# EAGLE board node-mcu-pack (EAGLE 7.5.0)
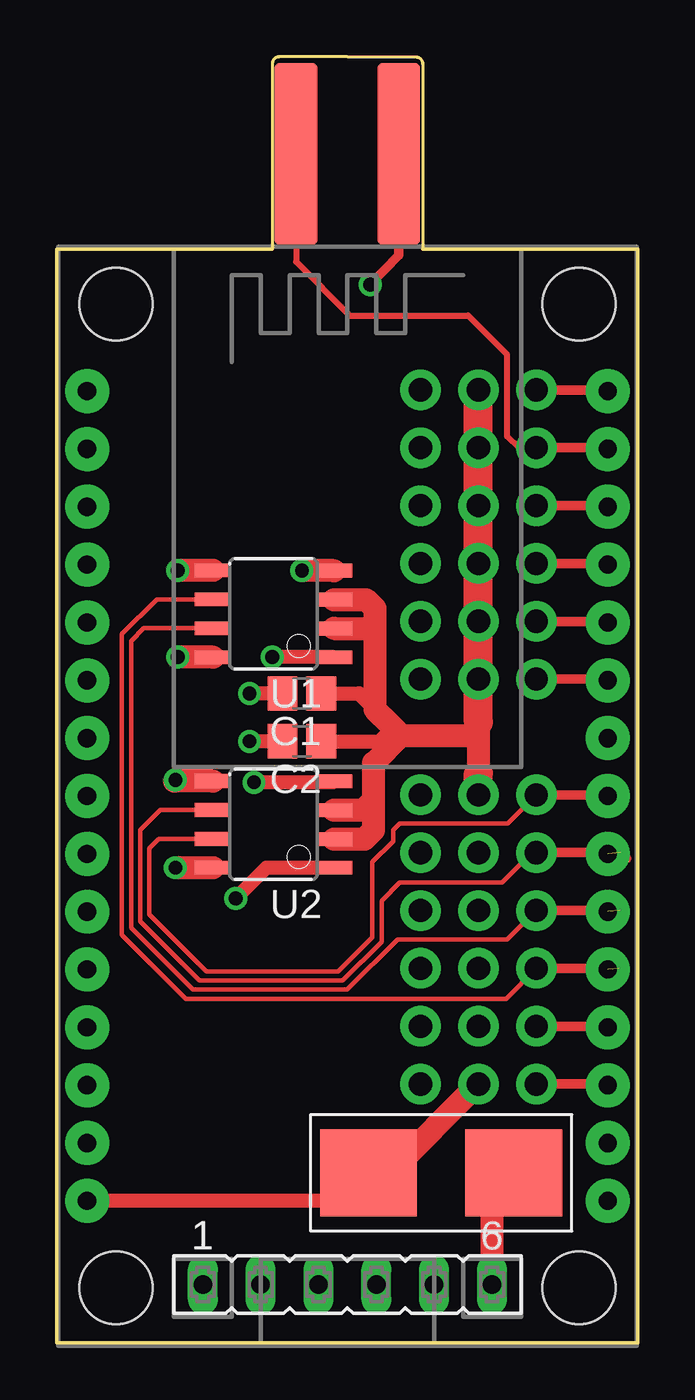
[diagram p0: board, top side]
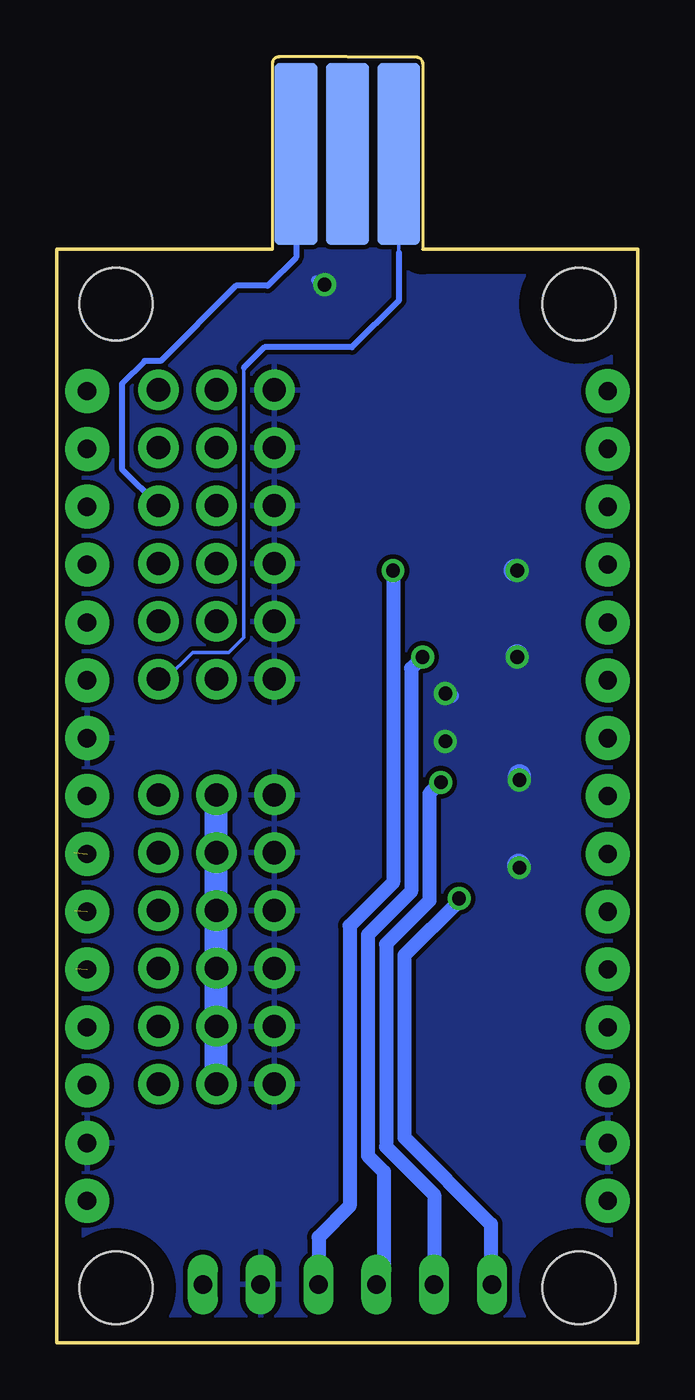
[diagram p1: board, bottom side, seen from below]

Size 25.5 x 56.45 mm. Coordinates in mm from the lower left corner, seen from the top.
Outline: 9.45,48 0,48 0,0 25.5,0 25.5,48 16.05,48
Copper layers (1*16): Top 0.035mm / dielectric 1.5mm / Bottom 0.035mm
Design rules "default": minimum track width 10mil, minimum drill 24mil, track to track 8mil, track to pad 8mil, pad to pad 8mil, via to via 8mil, smd to smd 8mil, copper to edge 40mil, drill to drill 8mil, minimum pad ring 10mil, minimum via ring 8mil, stop-mask expansion 4mil, vias tented up to drill 0mil, thermal gap 10mil

## Footprints (pad centres in the part's own frame; a part is rotated, then mirrored left to right if it is on the bottom)
C0805 = smd 1.3 x 1.5: 1 -0.85,0; 2 0.85,0
0154 = smd 4.24 x 3.81: 1 0,0; 2 6.38,0
IOBLOCK100MILX6 = drill 1.016 pad 1.778: G1 -5.08,5.08; G2 -2.54,5.08; G3 0,5.08; G4 2.54,5.08; G5 5.08,5.08; G6 7.62,5.08; P1 -5.08,2.54; P2 -2.54,2.54; P3 0,2.54; P4 2.54,2.54; P5 5.08,2.54; P6 7.62,2.54; P$1 -5.08,0; P$2 -2.54,0; P$3 0,0; P$4 2.54,0; P$5 5.08,0; P$6 7.62,0
FE06 = drill 0.813 long: 1 -6.35,0; 2 -3.81,0; 3 -1.27,0; 4 1.27,0; 5 3.81,0; 6 6.35,0
8S1 = smd 0.6 x 1.6: 1 -1.905,-2.654; 2 -0.645,-2.654; 3 0.625,-2.654; 4 1.895,-2.654; 5 1.905,2.654; 6 0.635,2.654; 7 -0.635,2.654; 8 -1.905,2.654
ESP12E_DEVKIT = drill 0.8 pad 1.93: 3V3@0 -11.43,-7.62; 3V3@1 11.43,5.08; 3V3@2 11.43,-17.78; AD0 -11.43,17.78; CLK -11.43,-2.54; CMD -11.43,2.54; D0 11.43,17.78; D1 11.43,15.24; D2 11.43,12.7; D3 11.43,10.16; D4 11.43,7.62; D5 11.43,0; D6 11.43,-2.54; D7 11.43,-5.08; D8 11.43,-7.62; EN -11.43,-10.16; GND@0 -11.43,-5.08; GND@1 -11.43,-15.24; GND@2 11.43,2.54; GND@3 11.43,-15.24; RST -11.43,-12.7; RSV@0 -11.43,15.24; RSV@1 -11.43,12.7; RX 11.43,-10.16; SD0 -11.43,0; SD1 -11.43,5.08; SD2 -11.43,7.62; SD3 -11.43,10.16; TX 11.43,-12.7; VIN -11.43,-17.78 | hole 3.2: -10.16,21.59; 10.16,21.59; 10.16,-21.59; -10.16,-21.59
CHUCK-OUTIE = smd 8 x 1.88 bottom: ATT 4.2,0; DAT 4.2,-2.255; PWR 4.2,2.255 | smd 8 x 1.88: CLK 4.2,2.255; GND 4.2,-2.255

## Placement (x,y rotation side)
C1  [C0805]  10.75,28.5 180 top
C2  [C0805]  10.75,26.4 180 top
F1  0154  [0154]  20.05,7.45 180 top
J1  IOBLOCK6  [IOBLOCK100MILX6]  21.04,36.75 270 bottom
J2  IOBLOCK6  [IOBLOCK100MILX6]  21.04,18.97 270 bottom
SV1  [FE06]  12.75,2.55 0 top
U1  L9110SMT  [8S1]  9.5,32 90 top
U2  L9110SMT  [8S1]  9.5,22.75 90 top
U$1  ESP12E_DEVKIT  [ESP12E_DEVKIT]  12.75,24 0 top
U$2  WIICHUCKOUTIE  [CHUCK-OUTIE]  12.75,48 90 top

## Library data of the parts
C1 C2 = adafruit
F1 = SMT_Fuse_0154001
J1 J2 = ioblock
SV1 = con-lsta; OC_FARNELL: unknown; OC_NEWARK: unknown
U1 U2 = L9110h
U$1 = ESP12E_DEVKIT
U$2 = wiichuck

## Nets
1AO: SV1.3 U1.1
1BO: SV1.4 U1.4
2AO: SV1.1 U2.1
2BO: SV1.2 U2.4
3V3: J1.P$6 U$1.3V3@1 U$2.PWR
D0: J1.P$1 U$1.D0
D1: J1.P$2 U$1.D1 U$2.CLK
D2: J1.P$3 U$1.D2 U$2.DAT
D5: J2.P$1 U2.7 U$1.D5
D6: J2.P$2 U2.6 U$1.D6
D7: J2.P$3 U1.7 U$1.D7
D8: J2.P$4 U1.6 U$1.D8
GND: C1.2 C2.2 J1.G1 J1.G2 J1.G3 J1.G4 J1.G5 J1.G6 J2.G1 J2.G2 J2.G3 J2.G4 J2.G5 J2.G6 SV1.5 U1.5 U1.8 U2.5 U2.8 U$1.GND@1 U$1.GND@2 U$1.GND@3 U$2.GND
N$1: F1.1 SV1.6
N$4: J2.P$6 U$1.TX
N$5: J2.P$5 U$1.RX
N$11: J1.P$5 U$1.D4
N$12: J1.P$4 U$1.D3
VCC: C1.1 C2.1 F1.2 J1.P1 J1.P2 J1.P3 J1.P4 J1.P5 J1.P6 J2.P1 J2.P2 J2.P3 J2.P4 J2.P5 J2.P6 U1.2 U1.3 U2.2 U2.3 U$1.VIN

## Tracks (layer width: path | path; a pad name or v marks a point on that pad's centre or on a via)
1AO  (via drill 0.6)
  Top 0.61: U1.1 v9.45,30.09 v9.45,30.1
  Bottom 0.61: v9.45,30.1 9.95,29.6 9.95,19.8 11.85,17.9 11.85,8.2 11.15,7.5 11.15,2.88 SV1.3
1BO  (via drill 0.6)
  Top 1.016: U1.4 v10.75,33.9
  Bottom 0.61: v10.75,33.9 10.75,20.2 12.65,18.3 12.65,6 14.02,4.63 SV1.4
2AO  (via drill 0.6)
  Top 0.61: U2.1 9.2,20.84 v7.85,19.5
  Bottom 0.61: v7.85,19.5 7.85,19.4 10.25,17 10.25,9 6.45,5.2 6.45,2.6 SV1.1
2BO  (via drill 0.6)
  Top 0.61: U2.4 12.11,24.6 v8.65,24.6
  Bottom 0.61: v8.65,24.6 9.15,24.1 9.15,19.4 11.05,17.5 11.05,8.6 8.94,6.49 SV1.2
3V3
  Top 0.406: J1.P$6 24.13,29.13 U$1.3V3@1
  Bottom 0.152: J1.P$6 20.72,29.13 19.55,30.3 17.95,30.3 17.3,30.95 17.3,42.8 | 10.5,47.85 U$2.PWR
  Bottom 0.254: 10.5,47.85 10.5,45.76 12.55,43.7 16.4,43.7 17.3,42.8
D0
  Top 0.406: J1.P$1 24.13,41.83 U$1.D0
D1
  Top 0.254: U$2.CLK 10.5,47.45 12.85,45.1 18.05,45.1 19.75,43.4 19.75,39.8 20.26,39.29 J1.P$2
  Top 0.406: J1.P$2 24.13,39.29 U$1.D1
D2
  Top 0.406: J1.P$3 24.13,36.75 U$1.D2
  Bottom 0.254: U$2.DAT 15,47.65 16.25,46.4 17.65,46.4 20.95,43.1 21.65,43.1 22.65,42.1 22.65,38.36 J1.P$3
D5
  Top 0.203: U2.7 4.46,22.11 4.05,21.7 4.05,18.8 6.55,16.3 12.35,16.3 13.85,17.8 13.85,21.1 14.75,22 14.75,22.5 15.05,22.8 19.79,22.8 J2.P$1
  Top 0.406: J2.P$1 24.13,24.05 U$1.D5
D6  (1 unrouted)
  Top 0.203: J2.P$2 20.86,21.51 19.55,20.2 15.05,20.2 14.25,19.4 14.25,17.6 12.55,15.9 6.25,15.9 3.65,18.5 3.65,22.5 4.54,23.39 U2.6
  Top 0.406: J2.P$2 24.74,21.51 25,21.25
D7  (1 unrouted)
  Top 0.203: U1.7 3.82,31.36 3.25,30.8 3.25,18.2 5.95,15.5 12.75,15.5 14.95,17.7 19.77,17.7 J2.P$3
  Top 0.406: J2.P$3 24.72,18.97 24.75,19
D8  (1 unrouted)
  Top 0.203: J2.P$4 19.71,15.1 5.65,15.1 2.85,17.9 2.85,31.1 4.39,32.63 U1.6
  Top 0.406: J2.P$4 24.68,16.43 24.75,16.5
GND  (via drill 0.6)
  Top 0.406: U$2.GND 15,47.76 v13.75,46.45
  Top 0.61: C2.2 v8.45,26.4 | C1.2 v8.45,28.5
  Top 1.016: U1.5 v5.3,33.91 v5.3,33.9 | U1.8 v5.3,30.09 v5.3,30.1 | U2.5 5.16,24.66 v5.2,24.7 | U2.8 v5.2,20.84 v5.2,20.85
  Bottom 0.406: v13.75,46.45 14.15,46.65
  Bottom 0.61: v8.45,26.4 8.35,26.4 | v8.45,28.5 8.25,28.5 8.15,28.4
  Bottom 1.016: v5.3,33.9 5.4,33.9 | v5.3,30.1 5.3,30.15 | v5.2,24.7 5.2,24.9 | v5.2,20.85 5.2,20.9 5.25,20.95
  pour Bottom: 0,48 0,0 25.5,0 25.5,48
N$1
  Top 1.016: SV1.6 19.1,6.5 F1.1
N$4
  Top 0.406: J2.P$6 24.13,11.35 U$1.TX
N$5
  Top 0.406: J2.P$5 24.13,13.89 U$1.RX
N$11
  Top 0.406: J1.P$5 24.13,31.67 U$1.D4
N$12
  Top 0.406: J1.P$4 24.13,34.21 U$1.D3
VCC
  Top 0.61: F1.2 12.44,6.22 U$1.VIN | C2.1 14.15,26.4 14.75,27 | C1.1 13.25,28.5 14.6,27.15
  Top 1.016: F1.2 14.6,7.45 J2.P6 | 18.5,27.25 18.5,26.5 | 18.5,26.5 18.5,25 | U1.3 13.57,32.62 13.95,32.25 13.95,31.3 | 13.95,31.3 13.95,27.8 14.6,27.15 14.75,27 15.1,26.65 | 15.1,26.65 18.35,26.65 18.5,26.5 | U1.2 13.89,31.36 13.95,31.3 | U2.3 13.48,23.38 13.85,23.75 | 13.85,23.75 13.9,23.8 13.9,25.45 15.1,26.65 | U2.2 13.5,22.11 13.9,22.5 13.9,23.7 13.85,23.75
  Top 1.27: 18.5,27.25 J1.P6 J1.P5 J1.P4 J1.P3 J1.P2 J1.P1 | J2.P1 18.5,25
  Bottom 1.016: J2.P6 J2.P5 J2.P4 J2.P3 J2.P2 J2.P1